# EAGLE board Anchor_v1 (EAGLE 9.5.2)
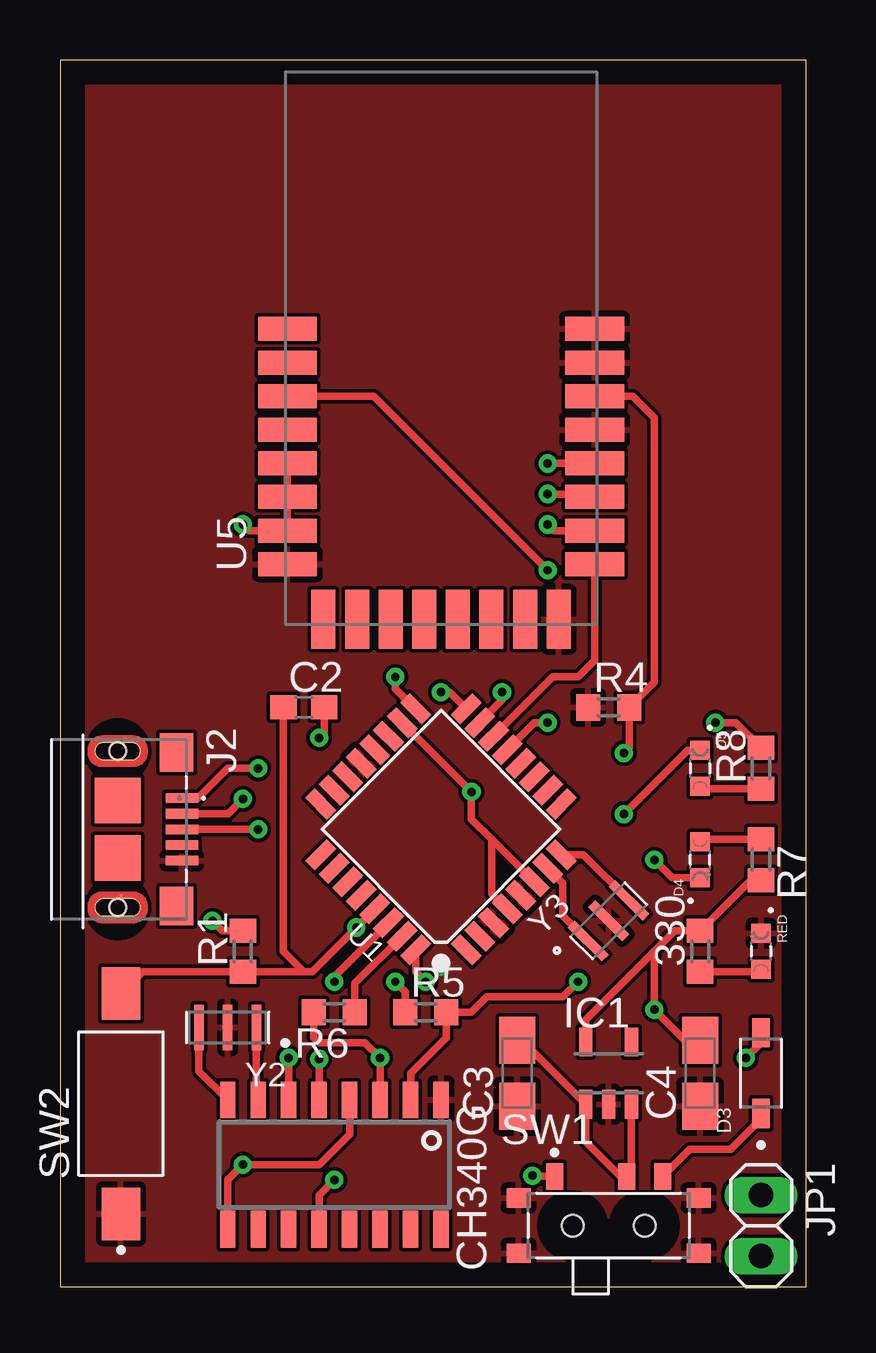
[diagram p0: board, top side]
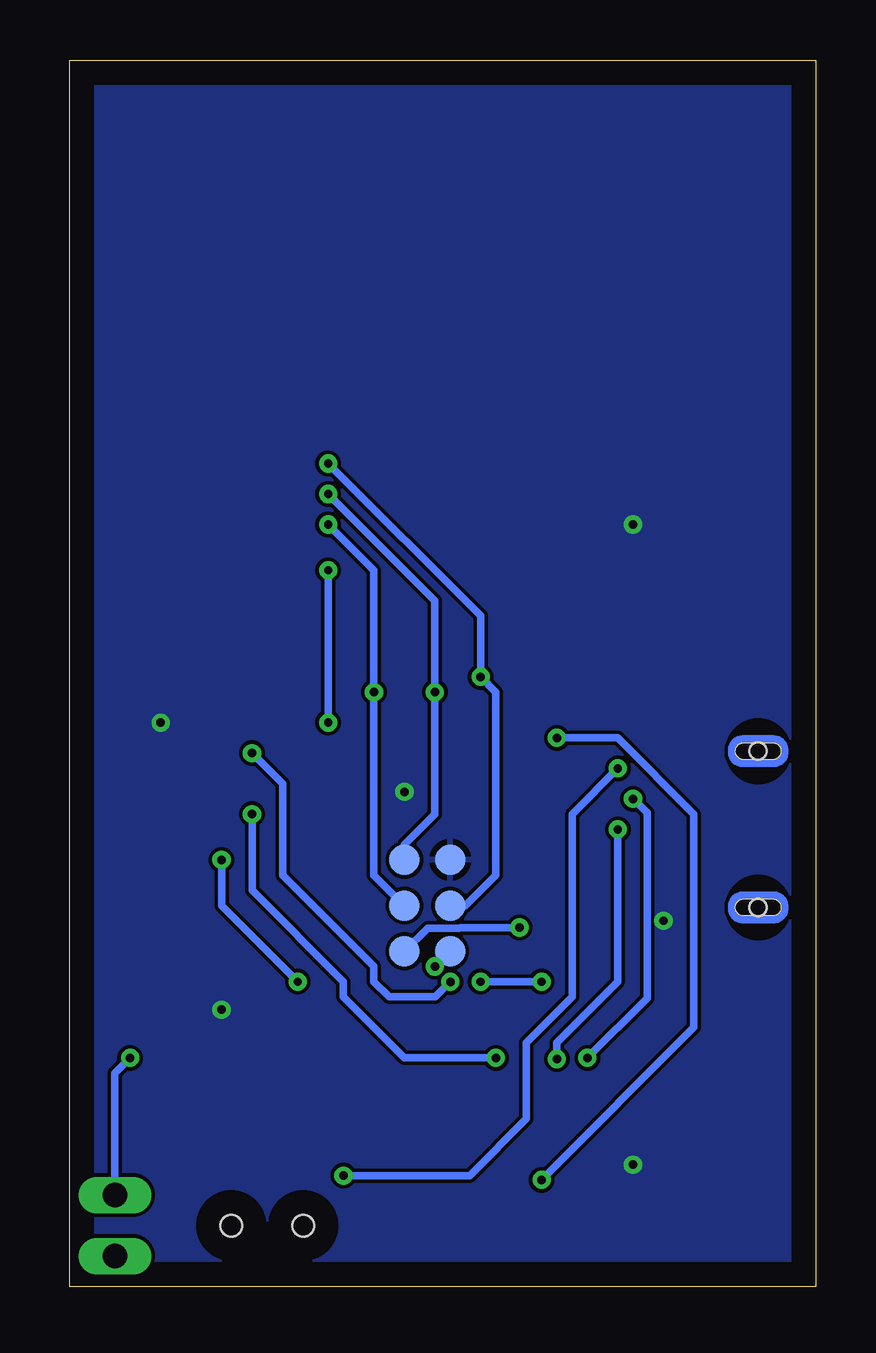
[diagram p1: board, bottom side, seen from below]

Size 31.09 x 51.1 mm. Coordinates in mm from the lower left corner, seen from the top.
Outline: 0,0 31.09,0 31.09,51.1 0,51.1 0,0
Copper layers (1*16): Top 0.035mm / dielectric 1.5mm / Bottom 0.035mm
Design rules "default": minimum track width 6mil, minimum drill 0.35mm, track to track 6mil, track to pad 6mil, pad to pad 6mil, via to via 6mil, smd to smd 6mil, copper to edge 40mil, drill to drill 6mil, minimum pad ring 10mil, minimum via ring 8mil, stop-mask expansion 4mil, vias tented up to drill 0mil, thermal gap 10mil

## Footprints (pad centres in the part's own frame; a part is rotated, then mirrored left to right if it is on the bottom)
R0603 = smd 1 x 1.1: 1 -0.85,0; 2 0.85,0
C0603 = smd 1.1 x 1: 1 -0.85,0; 2 0.85,0
A/3216-18R = smd 1.95 x 1.5: + 1.375,0; - -1.375,0
SOD3715X145N_NEW = smd 1.21 x 0.73: A 1.68,0; C -1.68,0
LEDM1608X80_NEW = smd 0.8 x 0.8: A 0.75,0; C -0.75,0
SOT23-5_NEW = smd 0.55 x 1.2: 1 -0.95,-1.3; 2 0,-1.3; 3 0.95,-1.3; 4 0.95,1.3; 5 -0.95,1.3
TE_2013499-1_NEW = smd 0.4 x 1.35: 1 -1.3,0; 2 -0.65,0; 3 0,0; 4 0.65,0; 5 1.3,0 | smd 1.6 x 1.4: 6 3.2,-0.225; 7 -3.2,-0.225 | smd 1.9 x 1.9: 8 -1.2,-2.675; 9 1.2,-2.675 | smd 0.1 x 0.1: 10 -3.76,-2.37; 11 2.75,-2.53 | hole 0.71: -3.255,-2.675; 3.255,-2.675
1X02 = drill 1.016 long: 1 -1.27,0; 2 1.27,0
SW_MLL1200S_NEW = smd 0.7 x 1.1: 1 -2.25,2.05; 2 0.75,2.05; 3 2.25,2.05 | smd 1 x 0.8: G1 -3.75,1.15; G2 3.75,1.15; G3 -3.75,-1.15; G4 3.75,-1.15 | hole 0.9: -1.5,0; 1.5,0
TE_FSMSM_NEW = smd 2.19 x 1.6: 1 -4.59,0; 2 4.59,0
B1,27 = smd 1.27 x 1.27: TP 0,0
TQFP32-0.8-7X7MM_NEW = smd 1.27 x 0.559: 1 -4.293,2.8; 2 -4.293,2; 3 -4.293,1.2; 4 -4.293,0.4; 5 -4.293,-0.4; 6 -4.293,-1.2; 7 -4.293,-2; 8 -4.293,-2.8; 17 4.293,-2.8; 18 4.293,-2; 19 4.293,-1.2; 20 4.293,-0.4; 21 4.293,0.4; 22 4.293,1.2; 23 4.293,2; 24 4.293,2.8 | smd 0.559 x 1.27: 9 -2.8,-4.293; 10 -2,-4.293; 11 -1.2,-4.293; 12 -0.4,-4.293; 13 0.4,-4.293; 14 1.2,-4.293; 15 2,-4.293; 16 2.8,-4.293; 25 2.8,4.293; 26 2,4.293; 27 1.2,4.293; 28 0.4,4.293; 29 -0.4,4.293; 30 -1.2,4.293; 31 -2,4.293; 32 -2.8,4.293
XCVR_DWM1000_NEW = smd 2.45 x 1: 1 -6.4,1.8; 2 -6.4,0.4; 3 -6.4,-1; 4 -6.4,-2.4; 5 -6.4,-3.8; 6 -6.4,-5.2; 7 -6.4,-6.6; 8 -6.4,-8; 17 6.4,-8; 18 6.4,-6.6; 19 6.4,-5.2; 20 6.4,-3.8; 21 6.4,-2.4; 22 6.4,-1; 23 6.4,0.4; 24 6.4,1.8 | smd 1 x 2.45: 9 -4.9,-10.295; 10 -3.5,-10.295; 11 -2.1,-10.295; 12 -0.7,-10.295; 13 0.7,-10.295; 14 2.1,-10.295; 15 3.5,-10.295; 16 4.9,-10.295
SOIC16_NEW = smd 0.635 x 1.524: 1 -4.445,-2.695; 2 -3.175,-2.695; 3 -1.905,-2.695; 4 -0.635,-2.695; 5 0.635,-2.695; 6 1.905,-2.695; 7 3.175,-2.695; 8 4.445,-2.695; 9 4.445,2.695; 10 3.175,2.695; 11 1.905,2.695; 12 0.635,2.695; 13 -0.635,2.695; 14 -1.905,2.695; 15 -3.175,2.695; 16 -4.445,2.695
OSC_CSTCE12M0G15L99-R0_NEW = smd 0.4 x 1.9: 1 -1.2,0; 2 0,0; 3 1.2,0
OSC_CSTCE8M00G52-R0_NEW = smd 0.4 x 2: 1 -1.2,0; 2 0,0; 3 1.2,0

## Placement (x,y rotation side)
330  [R0603]  26.67,13.97 90 top
C2  [C0603]  10.16,24.13 0 top
C3  [A/3216-18R]  19.05,8.89 90 top
C4  [A/3216-18R]  26.67,8.89 90 top
D3  1N5819HW-7-FSCHOTTKEYDIODE  [SOD3715X145N_NEW]  29.21,8.89 90 top
D4  HSMN-C190LED_GREEN  [LEDM1608X80_NEW]  26.67,17.78 90 top
D5  HSMN-C190LED_YELLOW  [LEDM1608X80_NEW]  26.67,21.59 270 top
IC1  MIC5219BM5MIC5219_3.3  [SOT23-5_NEW]  22.86,8.89 0 top
J2  2013499-1USB-2.0  [TE_2013499-1_NEW]  5.08,19.05 270 top
JP1  [1X02]  29.21,2.54 270 top
R1  10k  [R0603]  7.62,13.97 90 top
R4  10k  [R0603]  22.86,24.13 0 top
R5  [R0603]  15.24,11.43 0 top
R6  [R0603]  11.43,11.43 180 top
R7  [R0603]  29.21,17.78 270 top
R8  [R0603]  29.21,21.59 90 top
RED  HSMN-C190LED_RED  [LEDM1608X80_NEW]  29.21,13.97 270 top
SW1  MLL1200SDPST_SWITCH  [SW_MLL1200S_NEW]  22.86,2.54 0 top
SW2  FSMSMRESET_SPST  [TE_FSMSM_NEW]  2.54,7.62 90 top
TP1  TPB1,27  [B1,27]  17.14,17.78 180 bottom
TP2  TPB1,27  [B1,27]  15.24,15.88 180 bottom
TP3  TPB1,27  [B1,27]  17.14,13.97 180 bottom
TP4  TPB1,27  [B1,27]  15.24,13.97 180 bottom
TP5  TPB1,27  [B1,27]  17.14,15.88 180 bottom
TP6  TPB1,27  [B1,27]  15.24,17.78 180 bottom
U1  MCU-ATMEGA328P-AU(TQFP32)32PIN  [TQFP32-0.8-7X7MM_NEW]  15.88,19.05 135 top
U5  DWM1000DWM1000  [XCVR_DWM1000_NEW]  15.88,38.1 0 top
U$1  CH340G16PIN  [SOIC16_NEW]  11.43,5.08 180 top
Y2  CSTCE12M0G15L99-R012MHZ  [OSC_CSTCE12M0G15L99-R0_NEW]  6.99,10.79 180 top
Y3  CSTCE8M00G52-R08MHZ  [OSC_CSTCE8M00G52-R0_NEW]  22.86,15.24 45 top

## Library data of the parts
330 R1 R4-R8 = rcl; SPICEPREFIX: R
C2-C4 = rcl; SPICEPREFIX: C
D3 = 1N5819HW-7-F
D4 = led_green
D5 = led_yellow
IC1 = MIC5219BM5
J2 = 2013499-1
JP1 = pinhead
RED = led_red
SW1 = MLL1200S
SW2 = FSMSM
TP1-TP6 = testpad
U1 = MCU-ATMEGA328P-AU_TQFP32_
U5 = DWM1000
U$1 = ch340g
Y2 = CSTCE12M0G15L99-R0
Y3 = CSTCE8M00G52-R0

## Nets
3.3V: 330.2 C4.+ IC1.5 R1.2 R7.2 R8.2 TP6.TP U1.4 U1.6 U1.18 U5.5 U5.6 U5.7 U$1.4 U$1.9
5V: J2.1 SW1.1
AREF: U1.20
AT_RST: C2.1 R1.1 SW2.2 TP3.TP U1.29
DWM_RST: U1.13 U5.3
DWM_SS: U1.14 U5.17
GND: C3.- C4.- IC1.2 J2.5 R4.1 RED.C SW1.G1 SW1.G2 SW1.G3 SW1.G4 SW2.1 TP4.TP U1.3 U1.5 U1.21 U5.8 U5.16 U5.21 U5.23 U5.24 U$1.1 Y2.2 Y3.2
IRQ: R4.2 U1.32 U5.22
MISO: TP1.TP U1.16 U5.19
MOSI: TP5.TP U1.15 U5.18
N$1: U1.7 Y3.1
N$2: JP1.2
N$3: D3.A JP1.1
N$4: D3.C SW1.3
N$5: U1.8 Y3.3
N$6: 330.1 RED.A
N$13: D4.C R5.2 U$1.2
N$14: C2.2 U$1.12
N$15: U$1.8 Y2.3
N$17: D5.C R6.2 U$1.3
N$18: D4.A R7.1
N$19: D5.A R8.1
N$20: U$1.7 Y2.1
N$21: J2.2 U$1.6
N$23: J2.3 U$1.5
RXD: R5.1 U1.30
SCK: TP2.TP U1.17 U5.20
TXD: R6.1 U1.31
VIN: C3.+ IC1.1 IC1.3 SW1.2

## Tracks (layer width: path | path; a pad name or v marks a point on that pad's centre or on a via)
3.3V  (via drill 0.35)
  Top 0.305: R7.2 28.78,16.93 330.2 25.61,14.82 24.77,13.97 | 17.99,18.63 17.14,19.48 v17.14,20.61 U1.18 | 17.99,18.63 U1.6 | U1.4 17.99,16.37 17.99,18.63 | IC1.5 21.91,11.12 24.77,13.97 | 24.77,13.97 v24.77,11.54 26.04,10.27 C4.+ | U$1.4 12.06,6.35 10.79,5.08 v7.62,5.08 6.99,4.45 U$1.9 | R1.2 6.77,14.82 v6.35,15.24 | R8.2 28.16,23.5 v27.3,23.5 | U5.5 U5.6 U5.7 7.87,31.5 v7.62,31.75
  pour Bottom: -1.27,52.7 32.38,52.7 32.38,-5.71 -1.27,-5.71
5V  (via drill 0.35)
  Top 0.305: J2.1 5.75,20.35 6.99,21.59 v8.26,21.59 | v19.68,4.62 19.72,4.59 SW1.1
  Bottom 0.305: v8.26,21.59 10.16,19.68 10.16,12.06 12.06,10.16 12.06,6.99 14.43,4.62 v19.68,4.62
AT_RST  (via drill 0.35)
  Top 0.305: SW2.2 3.45,13.12 R1.1 10.16,13.12 | 10.16,13.12 10.51,13.12 v12.35,14.96 U1.29 | C2.1 9.31,13.97 10.16,13.12
  Bottom 0.305: v12.35,14.96 14.83,14.96 14.85,14.94 16.18,14.94 TP3.TP
DWM_RST  (via drill 0.35)
  Top 0.305: U1.13 19.75,23.5 v20.32,23.5 | U5.3 13.06,37.1 v20.32,29.84
  Bottom 0.305: v20.32,23.5 v20.32,29.84
DWM_SS
  Top 0.305: U1.14 20.53,25.4 21.59,25.4 22.27,26.09 U5.17
GND  (via drill 0.35)
  Bottom 0.305: TP4.TP v15.88,13.34
  pour Top: -1.27,52.7 -1.27,-3.17 32.38,-3.17 32.38,52.7
IRQ  (via drill 0.35)
  Top 0.305: U5.22 23.86,37.1 24.77,36.2 24.77,25.18 R4.2 23.71,22.44 v23.5,22.23 | U1.32 14.82,13.11 v15.23,12.69
  Bottom 0.305: v15.23,12.69 15.86,12.06 17.78,12.06 18.41,12.7 18.41,13.34 22.23,17.14 22.23,20.95 v23.5,22.23
MISO  (via drill 0.35)
  Top 0.305: v15.88,24.77 16.23,24.77 U1.16 | v20.32,33.02 22.16,33.02 U5.19
  Bottom 0.305: TP1.TP 17.14,18.41 15.88,19.68 v15.88,24.77 15.88,28.57 v20.32,33.02
MOSI  (via drill 0.35)
  Top 0.305: v18.41,24.77 18.41,24.42 U1.15 | v20.32,31.75 20.57,31.5 U5.18
  Bottom 0.305: TP5.TP 18.41,17.14 v18.41,24.77 18.41,29.84 v20.32,31.75
N$1
  Top 0.305: Y3.1 20.95,15.45 20.95,16.8 U1.7
N$3  (via drill 0.35)
  Top 0.305: v28.57,9.53 29.21,10.16 D3.A
  Bottom 0.305: JP1.1 29.21,8.89 v28.57,9.53
N$4
  Top 0.305: SW1.3 26.23,5.71 27.94,5.71 29.21,6.99 D3.C
N$5
  Top 0.305: Y3.3 21.8,18 U1.8
N$6
  Top 0.305: 330.1 29.11,13.12 RED.A
N$13  (via drill 0.35)
  Top 0.305: U$1.2 14.61,8.89 16.09,10.38 R5.2 17.14,11.43 17.78,12.06 20.95,12.06 v21.59,12.7 | v24.77,17.78 25.52,17.03 D4.C
  Bottom 0.305: v24.77,17.78 24.77,15.88 v21.59,12.7
N$14  (via drill 0.35)
  Top 0.305: U$1.12 10.79,3.81 v11.43,4.45 | v10.79,22.86 11.01,23.07 C2.2
  Bottom 0.305: v11.43,4.45 5.08,10.79 5.08,19.68 8.26,22.86 v10.79,22.86
N$15
  Top 0.305: U$1.8 5.79,8.97 Y2.3
N$17  (via drill 0.35)
  Top 0.305: R6.2 10.58,10.38 10.79,10.16 12.7,10.16 v13.34,9.53 U$1.3 | D5.C 26.15,22.34 v23.5,19.68
  Bottom 0.305: v23.5,19.68 23.5,16.51 19.68,12.7 19.68,12.06 17.14,9.53 v13.34,9.53
N$18
  Top 0.305: R7.1 26.77,18.63 D4.A
N$19
  Top 0.305: R8.1 26.77,20.74 D5.A
N$20
  Top 0.305: U$1.7 8.19,7.84 Y2.1
N$21  (via drill 0.35)
  Top 0.305: U$1.6 v9.53,9.53 | v7.62,20.32 7,19.7 J2.2
  Bottom 0.305: v7.62,20.32 7.03,19.73 7.03,12.02 v9.53,9.53
N$23  (via drill 0.35)
  Top 0.305: J2.3 v8.26,19.05 | v10.79,9.48 U$1.5
  Bottom 0.305: v10.79,9.48 10.79,10.16 8.26,12.7 v8.26,19.05
RXD  (via drill 0.35)
  Top 0.305: U1.30 11.43,12.91 v11.43,12.7 | v13.97,12.7 14.39,12.28 R5.1
  Bottom 0.305: v11.43,12.7 v13.97,12.7
SCK  (via drill 0.35)
  Top 0.305: v13.97,25.4 13.97,24.91 U1.17 | v20.32,34.29 v20.33,34.3 U5.20
  Bottom 0.305: TP2.TP 14.61,15.88 13.34,17.14 13.34,24.77 v13.97,25.4 13.97,27.94 v20.32,34.29
TXD
  Top 0.305: R6.1 12.28,12.63 U1.31
VIN
  Top 0.305: C3.+ 19.23,10.27 IC1.1 21.91,6.03 23.35,4.59 SW1.2 23.81,4.79 IC1.3